# EAGLE board thtV1.2 (EAGLE 7.4.0)

Size 160 x 88.57 mm. Coordinates in mm from the lower left corner, seen from the top.
Outline: 0,0 160,0 160,88.57 0,88.57 0,0
Copper layers (1*16): Top 0.035mm / dielectric 1.5mm / Bottom 0.035mm
Design rules "default": minimum track width 10mil, minimum drill 24mil, track to track 8mil, track to pad 8mil, pad to pad 8mil, via to via 8mil, smd to smd 8mil, copper to edge 40mil, drill to drill 8mil, minimum pad ring 10mil, minimum via ring 8mil, stop-mask expansion 4mil, vias tented up to drill 0mil, thermal gap 10mil

## Footprints (pad centres in the part's own frame; a part is rotated, then mirrored left to right if it is on the bottom)
C025-024X044 = drill 0.813 octagon: 1 -1.27,0; 2 1.27,0
C050-030X075 = drill 0.813 octagon: 1 -2.54,0; 2 2.54,0
E5-10,5 = drill 1.016 pad 2.54: + -2.54,0 | drill 1.016 pad 2.54 octagon: - 2.54,0
E2,5-6E = drill 0.813 pad 1.575: + -1.27,0 | drill 0.813 pad 1.575 octagon: - 1.27,0
1X04-BIG = drill 1.016 pad 1.778: 1 0,0; 2 2.54,0; 3 5.08,0; 4 7.62,0
DO41-10 = drill 1.118 pad 1.93: A 5.08,0; C -5.08,0
DO-1N4148 = drill 0.9: A -3.81,0; C 3.81,0
GSH15 = drill 1.321 pad 2.54 long: 1 -7.62,0; 2 7.62,0 | hole 2.794: 0,0
DIL28-3 = drill 0.813 long: 1 -16.51,-3.81; 2 -13.97,-3.81; 3 -11.43,-3.81; 4 -8.89,-3.81; 5 -6.35,-3.81; 6 -3.81,-3.81; 7 -1.27,-3.81; 8 1.27,-3.81; 9 3.81,-3.81; 10 6.35,-3.81; 11 8.89,-3.81; 12 11.43,-3.81; 13 13.97,-3.81; 14 16.51,-3.81; 15 16.51,3.81; 16 13.97,3.81; 17 11.43,3.81; 18 8.89,3.81; 19 6.35,3.81; 20 3.81,3.81; 21 1.27,3.81; 22 -1.27,3.81; 23 -3.81,3.81; 24 -6.35,3.81; 25 -8.89,3.81; 26 -11.43,3.81; 27 -13.97,3.81; 28 -16.51,3.81
TO220V = drill 1.016 long: 1 -2.54,-2.54; 2 0,-2.54; 3 2.54,-2.54
1X2MTA = drill 1.676 long: 1 1.981,0; 2 -1.981,0
1X02 = drill 1.016 long: 1 -1.27,0; 2 1.27,0
LED3MM = drill 0.813 pad 1.676 octagon: A -1.27,0; K 1.27,0
QS = drill 0.61 long: 1 -2.54,0; 2 2.54,0
0207/10 = drill 0.813 octagon: 1 -5.08,0; 2 5.08,0
0204V = drill 0.813 octagon: 1 -1.27,0; 2 1.27,0
0207/2V = drill 0.813 octagon: 1 -1.27,0; 2 1.27,0
TACT_PANA-EVQ = drill 1.3 pad 2.54: P$1 -3.25,0; P$2 3.25,0
TO92-EBC-OVAL = drill 0.813 long: B 0,-1.27; C 2.54,-1.27; E -2.54,-1.27
AK300/8 = drill 1.321 long: 1 -17.501,0; 2 -12.497,0; 3 -7.518,0; 4 -2.515,0; 5 2.515,0; 6 7.518,0; 7 12.497,0; 8 17.501,0
JST-XH-04-PACKAGE-LONG-PAD = drill 1.016 long: 1 -3.81,0; 2 -1.27,0; 3 1.27,0; 4 3.81,0
AK300/2 = drill 1.321 long: 1 -2.515,0; 2 2.489,0
JST-XH-06-PACKAGE-LONG-PAD = drill 1.016 long: 1 -6.35,0; 2 -3.81,0; 3 -1.27,0; 4 1.27,0; 5 3.81,0; 6 6.35,0

## Placement (x,y rotation side)
C1  18p  [C025-024X044]  -48.26,72.39 0 top  (outside the outline)
C2  18p  [C025-024X044]  -53.34,72.39 0 top  (outside the outline)
C3  0u1  [C050-030X075]  -86.36,64.77 0 top  (outside the outline)
C4  4.7u  [E5-10,5]  -59.69,44.45 0 top  (outside the outline)
C5  100u  [E5-10,5]  -72.39,44.45 0 top  (outside the outline)
C7  47u  [E2,5-6E]  -41.91,72.39 0 top  (outside the outline)
CN1  Ds3231(i2c)  [1X04-BIG]  -57.15,64.77 0 top  (outside the outline)
CN2  I2C-GPO  [1X04-BIG]  -68.58,64.77 0 top  (outside the outline)
CN3  I2C-APU  [1X04-BIG]  -80.01,64.77 0 top  (outside the outline)
CN4  1X4-BIG  [1X04-BIG]  -87.63,-5.08 0 top  (outside the outline)
CN5  1X4-BIG  [1X04-BIG]  -87.63,-12.7 0 top  (outside the outline)
CN6  1X4-BIG  [1X04-BIG]  -87.63,-20.32 0 top  (outside the outline)
CN7  1X4-BIG  [1X04-BIG]  -87.63,-27.94 0 top  (outside the outline)
D1  1N4004  [DO41-10]  -19.05,72.39 0 top  (outside the outline)
D2  [DO-1N4148]  -27.94,93.98 0 top  (outside the outline)
D3  [DO-1N4148]  -38.1,93.98 0 top  (outside the outline)
D4  [DO-1N4148]  -48.26,93.98 0 top  (outside the outline)
D5  [DO-1N4148]  -58.42,93.98 0 top  (outside the outline)
F1  F1A  [GSH15]  -50.8,26.67 0 top  (outside the outline)
IC1  ATMEGA328  [DIL28-3]  -31.75,44.45 0 top  (outside the outline)
IC3  7805TV  [TO220V]  -83.82,46.99 0 top  (outside the outline)
J1  PowerIn  [1X2MTA]  -33.02,26.67 0 top  (outside the outline)
JP1  Main Pushbutton  [1X02]  -44.45,64.77 0 top  (outside the outline)
LED1  Out1  [LED3MM]  -57.15,90.17 0 top  (outside the outline)
LED2  Out2  [LED3MM]  -67.31,90.17 0 top  (outside the outline)
LED3  Out3  [LED3MM]  -77.47,90.17 0 top  (outside the outline)
LED4  Out4  [LED3MM]  -87.63,90.17 0 top  (outside the outline)
LED5  GPO-clip  [LED3MM]  -35.56,90.17 0 top  (outside the outline)
LED6  pwr_ok  [LED3MM]  -46.99,90.17 0 top  (outside the outline)
LED8  Err  [LED3MM]  -20.32,95.25 0 top  (outside the outline)
Q1  16M  [QS]  -19.05,55.88 0 top  (outside the outline)
R1  1k  [0207/10]  -25.4,77.47 0 top  (outside the outline)
R2  1k  [0207/10]  -38.1,77.47 0 top  (outside the outline)
R3  1k  [0207/10]  -50.8,77.47 0 top  (outside the outline)
R4  1k  [0207/10]  -63.5,77.47 0 top  (outside the outline)
R5  470  [0204V]  -58.42,72.39 0 top  (outside the outline)
R6  470  [0204V]  -63.5,72.39 0 top  (outside the outline)
R7  470  [0204V]  -68.58,72.39 0 top  (outside the outline)
R8  470  [0204V]  -73.66,72.39 0 top  (outside the outline)
R9  100k  [0207/10]  -76.2,77.47 0 top  (outside the outline)
R10  0R1  [0207/10]  -19.05,83.82 0 top  (outside the outline)
R11  4R7  [0207/10]  -31.75,83.82 0 top  (outside the outline)
R16  1M  [0207/10]  -44.45,83.82 0 top  (outside the outline)
R17  1M  [0207/10]  -57.15,83.82 0 top  (outside the outline)
R18  1M  [0207/10]  -69.85,83.82 0 top  (outside the outline)
R19  1M  [0207/10]  -82.55,83.82 0 top  (outside the outline)
R24  470  [0207/10]  -19.05,88.9 0 top  (outside the outline)
R25  10k  [0204V]  -78.74,72.39 0 top  (outside the outline)
R26  330  [0207/2V]  -16.51,78.74 0 top  (outside the outline)
R27  10k  [0204V]  -83.82,72.39 0 top  (outside the outline)
SW1  Rst  [TACT_PANA-EVQ]  -30.48,72.39 0 top  (outside the outline)
T1  2N2222  [TO92-EBC-OVAL]  -29.21,55.88 0 top  (outside the outline)
T2  2N2222  [TO92-EBC-OVAL]  -36.83,55.88 0 top  (outside the outline)
T3  2N2222  [TO92-EBC-OVAL]  -44.45,55.88 0 top  (outside the outline)
T4  2N2222  [TO92-EBC-OVAL]  -52.07,55.88 0 top  (outside the outline)
X1  GPO  [AK300/8]  -66.04,10.16 0 top  (outside the outline)
X2  Serial_port  [JST-XH-04-PACKAGE-LONG-PAD]  -67.31,53.34 0 top  (outside the outline)
X4  Analog_Pwr  [AK300/2]  -21.59,29.21 0 top  (outside the outline)
X5  Sd_module  [JST-XH-06-PACKAGE-LONG-PAD]  -21.59,63.5 0 top  (outside the outline)

## Library data of the parts
C1-C3 = resistor
C4 C5 C7 R1-R11 R16-R19 R24-R27 = rcl
CN1-CN7 D1-D5 IC1 LED1-LED6 LED8 SW1 T1-T4 = adafruit
F1 = fuse; MPN: 64900001039; OC_FARNELL: 1271673; OC_NEWARK: 02P0318
IC3 = linear
J1 = con-amp
JP1 = pinhead
Q1 = special
X1 X4 = con-ptr500; OC_FARNELL: unknown; OC_NEWARK: unknown
X2 X5 = Rembrandt Electronics - JST XH Connectors v1-0

## Nets
+5V: C4.+ C7.+ CN1.3 CN2.3 CN3.3 CN4.3 CN5.3 CN6.3 CN7.3 D2.C D3.C D4.C D5.C IC1.7 IC1.20 IC3.3 LED5.A R10.2 R11.1 R25.1 R27.1 X5.2
GND: C1.2 C2.2 C4.- C5.- C7.- CN1.4 CN2.4 CN3.4 CN4.4 CN5.4 CN6.4 CN7.4 D1.A IC1.8 IC1.22 IC3.2 J1.1 JP1.2 LED1.K LED2.K LED3.K LED4.K LED6.K LED8.K R9.1 R16.2 R17.2 R18.2 R19.2 SW1.P$2 T1.E T2.E T3.E T4.E X2.1 X4.2 X5.1
I2C_SCL: CN1.2 CN2.2 CN3.2 IC1.28 R27.2
I2C_SDA: CN1.1 CN2.1 CN3.1 IC1.27 R25.2
N$1: C2.1 IC1.9 Q1.2
N$3: R4.2 T4.B
N$4: R3.2 T3.B
N$5: LED8.A R26.2
N$6: LED3.A R7.2
N$7: LED2.A R6.2
N$8: LED1.A R5.2
N$9: LED4.A R8.2
N$10: R1.2 T1.B
N$11: R2.2 T2.B
N$12: IC1.12 R4.1 R8.1
N$13: R10.1 X4.1
N$14: IC1.13 R3.1 R7.1
N$15: IC1.14 R2.1 R6.1
N$16: CN5.1 D3.A IC1.24 R17.1
N$17: IC1.11 JP1.1
N$18: T3.C X1.4
N$19: C1.1 IC1.10 Q1.1
N$20: IC1.6 R26.1
N$21: C3.1 X2.2
N$22: IC1.18 X5.3
N$23: IC1.19 X5.5
N$24: IC1.2 X2.3
N$25: IC1.3 X2.4
N$26: IC1.17 X5.4
N$27: F1.1 J1.2
N$29: C5.+ D1.C F1.2 IC3.1 R24.1
N$30: C3.2 IC1.1 R9.2 SW1.P$1
N$32: IC1.16 X5.6
N$34: T1.C X1.8
N$35: T2.C X1.6
N$37: T4.C X1.2
N$38: LED5.K R11.2 X1.1 X1.3 X1.5 X1.7
N$42: CN7.1 D5.A IC1.26 R19.1
N$43: CN4.1 D2.A IC1.23 R16.1
N$50: CN6.1 D4.A IC1.25 R18.1
N$52: LED6.A R24.2
N$57: IC1.15 R1.1 R5.1

## Tracks (layer width: path | path; a pad name or v marks a point on that pad's centre or on a via)
+5V  (21 unrouted)
GND  (36 unrouted)
I2C_SCL  (4 unrouted)
I2C_SDA  (4 unrouted)
N$1  (2 unrouted)
N$3  (1 unrouted)
N$4  (1 unrouted)
N$5  (1 unrouted)
N$6  (1 unrouted)
N$7  (1 unrouted)
N$8  (1 unrouted)
N$9  (1 unrouted)
N$10  (1 unrouted)
N$11  (1 unrouted)
N$12  (2 unrouted)
N$13  (1 unrouted)
N$14  (2 unrouted)
N$15  (2 unrouted)
N$16  (3 unrouted)
N$17  (1 unrouted)
N$18  (1 unrouted)
N$19  (2 unrouted)
N$20  (1 unrouted)
N$21  (1 unrouted)
N$22  (1 unrouted)
N$23  (1 unrouted)
N$24  (1 unrouted)
N$25  (1 unrouted)
N$26  (1 unrouted)
N$27  (1 unrouted)
N$29  (4 unrouted)
N$30  (3 unrouted)
N$32  (1 unrouted)
N$34  (1 unrouted)
N$35  (1 unrouted)
N$37  (1 unrouted)
N$38  (5 unrouted)
N$42  (3 unrouted)
N$43  (3 unrouted)
N$50  (3 unrouted)
N$52  (1 unrouted)
N$57  (2 unrouted)